# Altium PCB Glowna_plytka.PcbDoc
Units mil, origin at the board's own origin, x right, y up, seen from the top; angles counter-clockwise.
Board outline 3940 x 3940 mil, 2 copper layers (Top Layer, Bottom Layer); 69 components, 57 nets, 273 pads, 20 vias.
Unrouted connection lines stored in the file: 128.
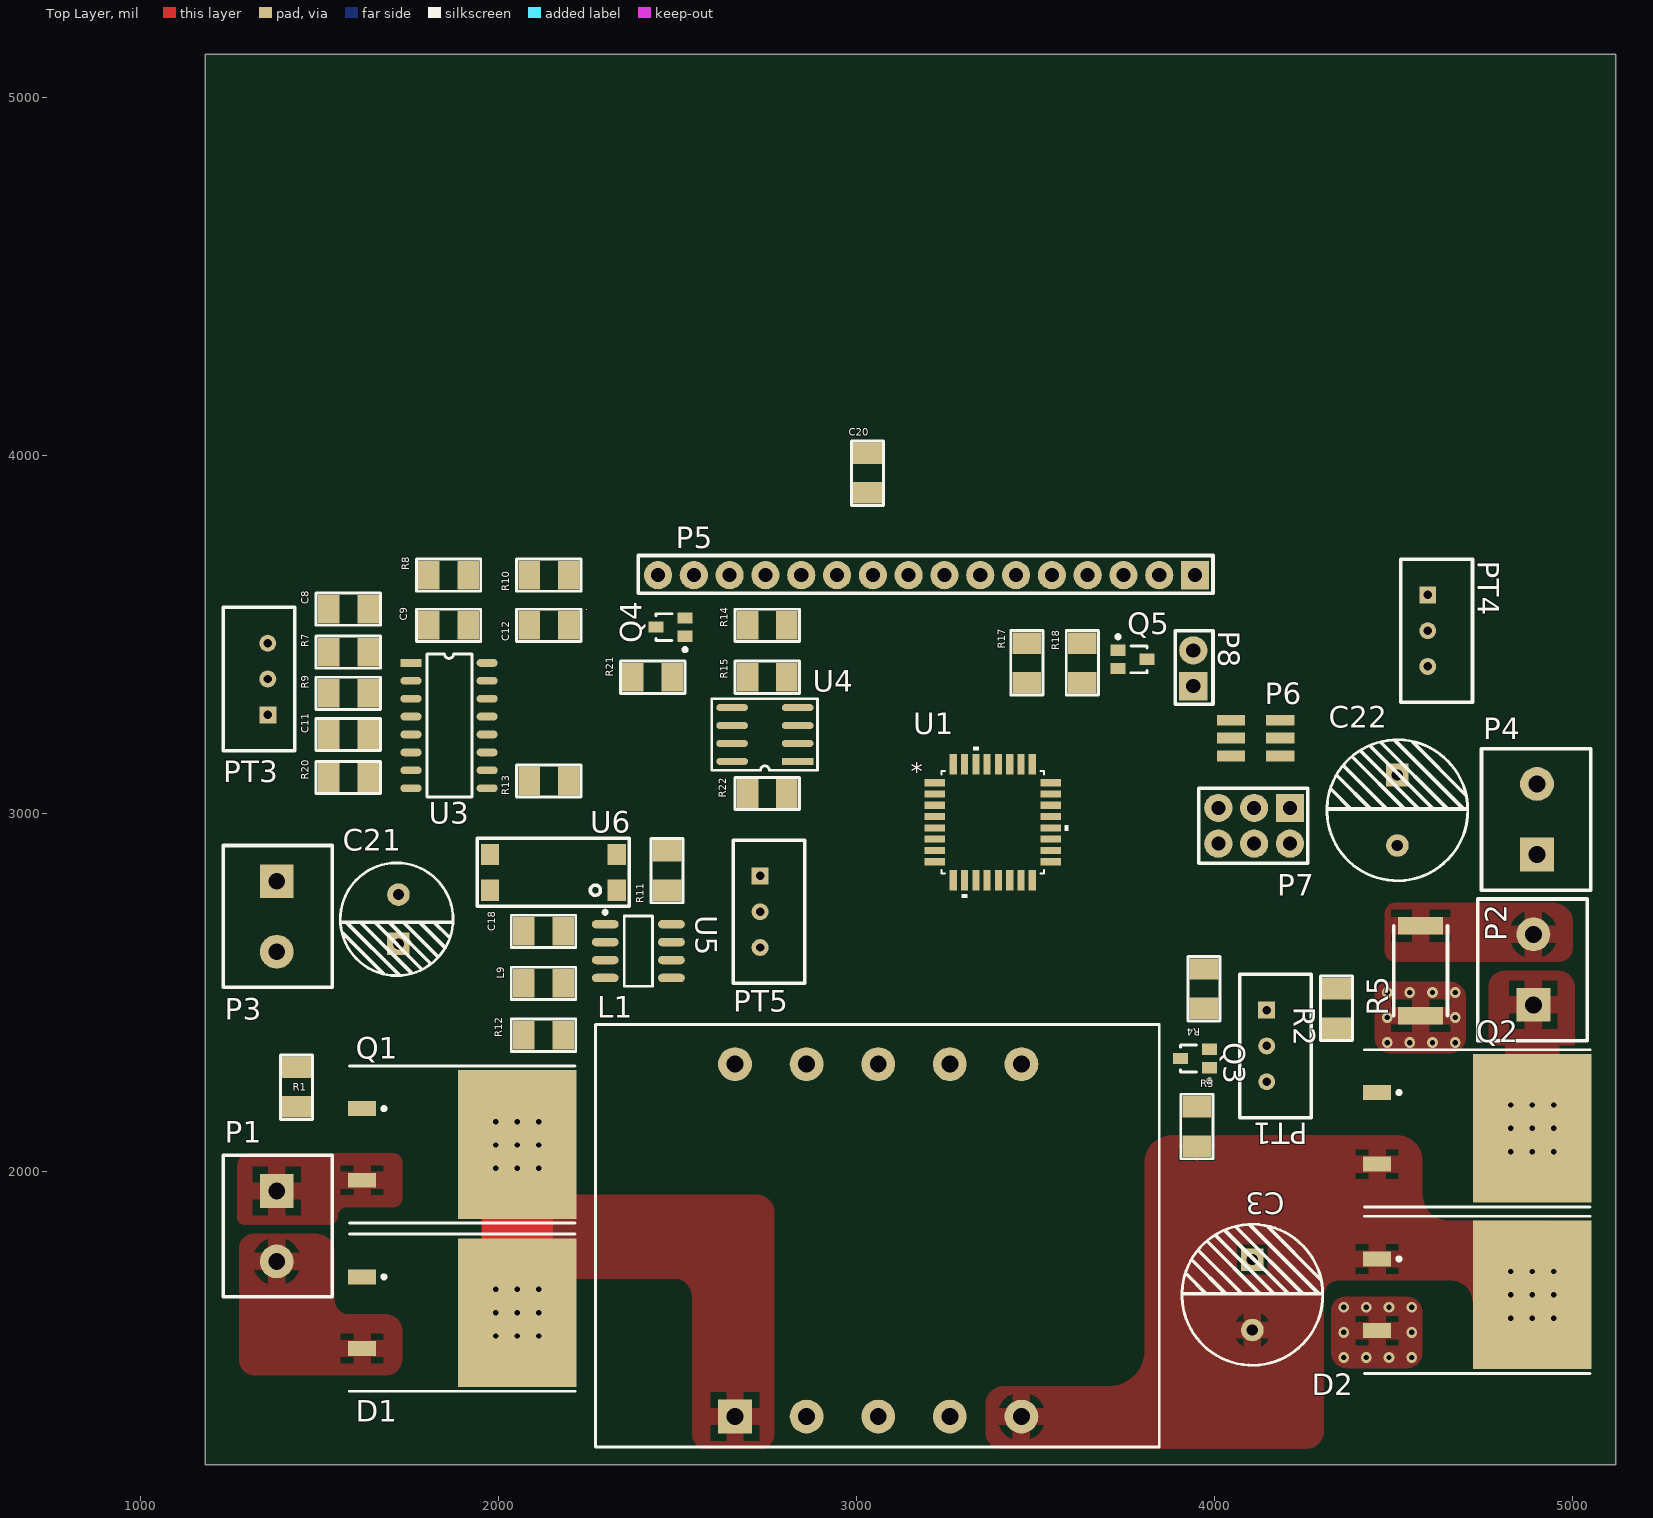
[diagram p0: Top Layer view]
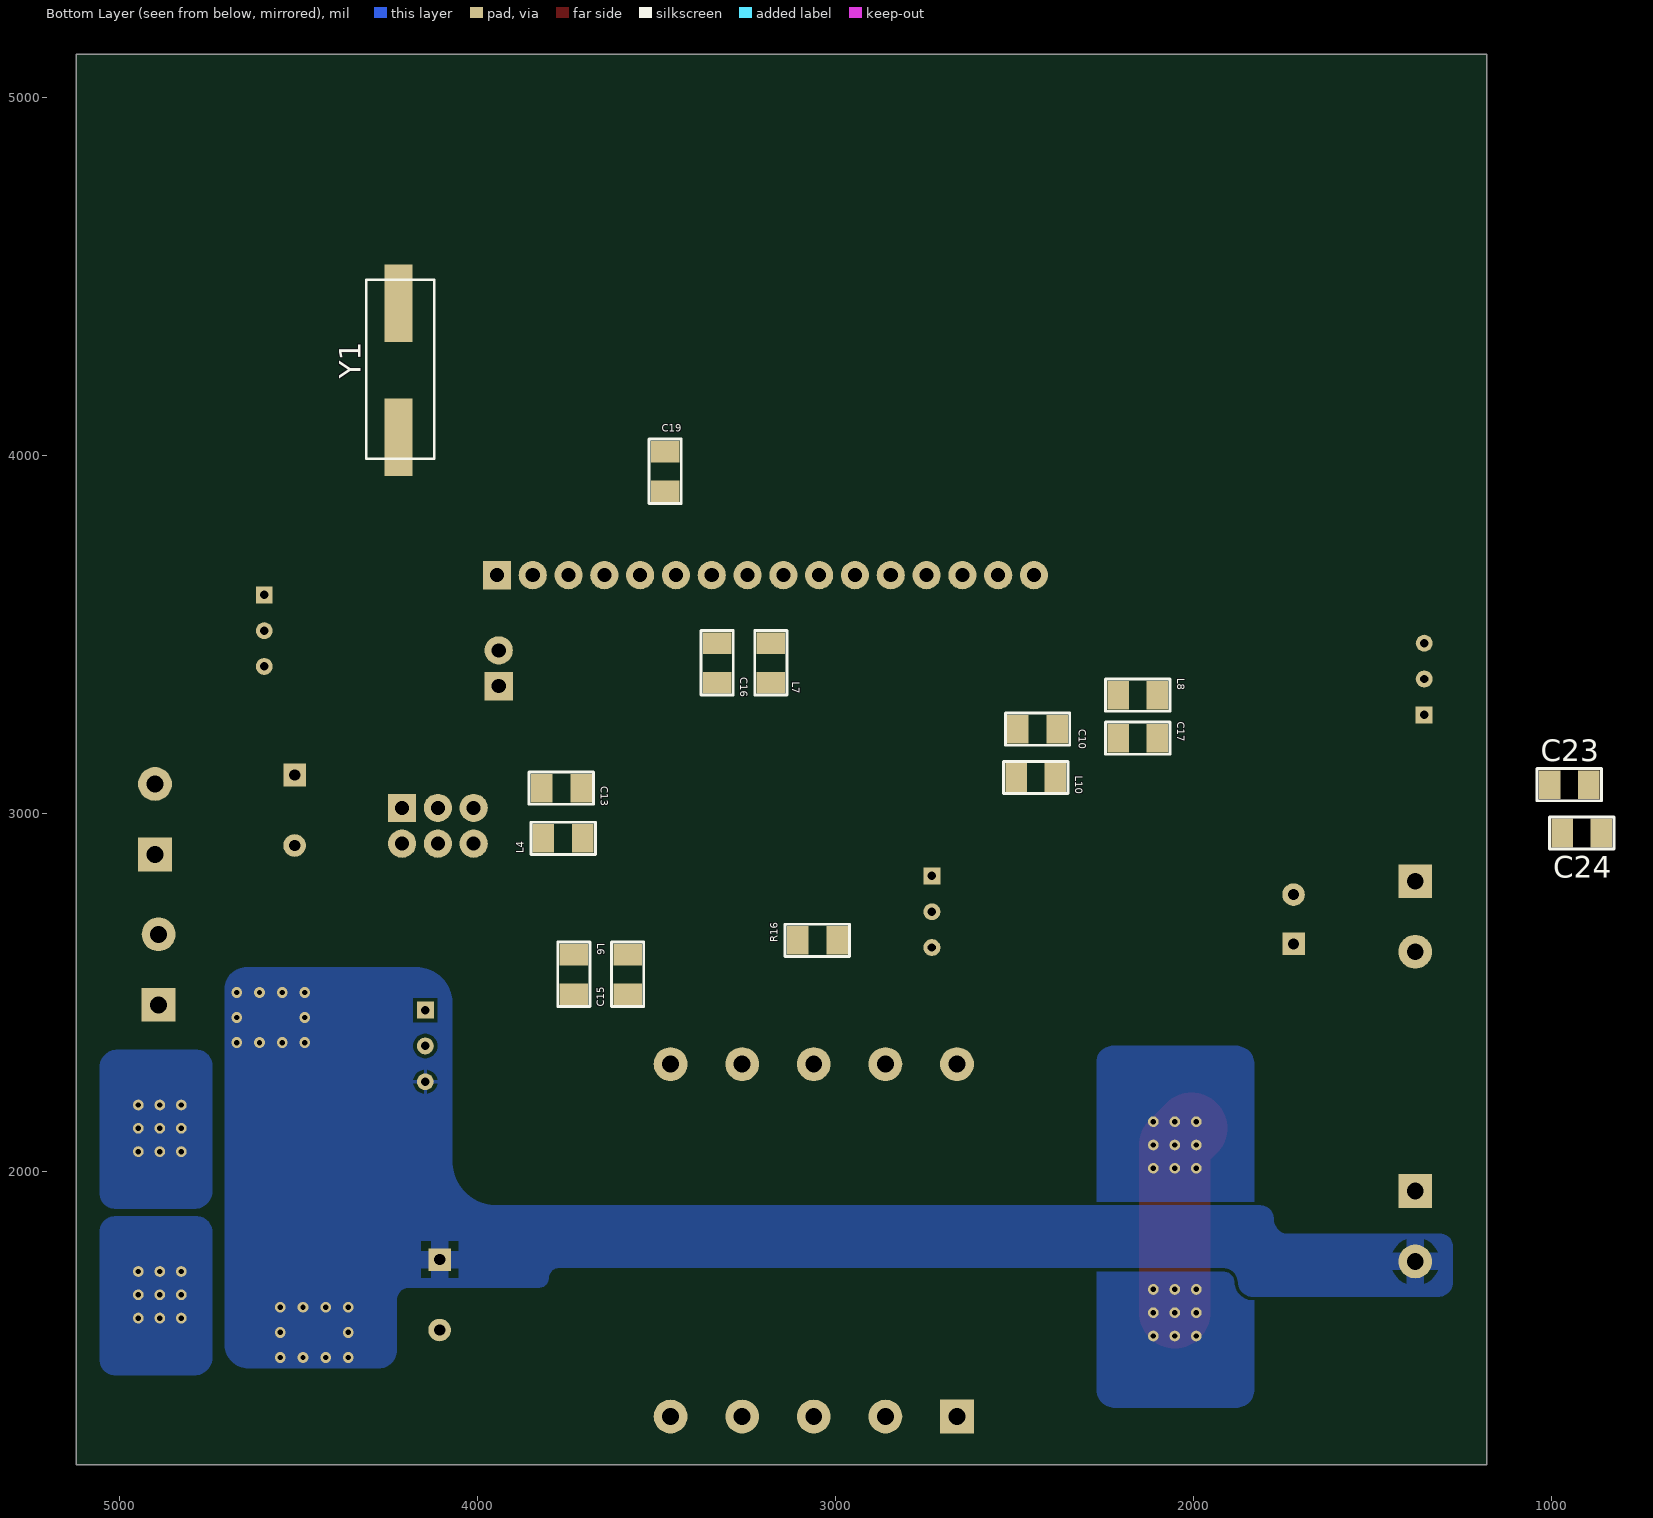
[diagram p1: Bottom Layer view, seen from below]

## Layer stack, top to bottom
Top Solder: solder mask 0.4, Solder Resist, Dk 3.5
Top Layer: signal copper 1.4
Dielectric1: dielectric 12.6, FR-4, Dk 4.8
Bottom Layer: signal copper 1.4
Bottom Solder: solder mask 0.4, Solder Resist, Dk 3.5

## Board outline
1180,1180 5120,1180 5120,5120 1180,5120

## Design rules (kind name [scope] priority, off if disabled: settings)
Clearance [All] p1: gap=10 ignorepadtopadclearanceinfootprint=FALSE except(0: Arc-Hole Track-Hole SMDPad-Hole THPad-Hole Via-Hole Fill-Hole Poly-Hole Region-Hole Text-Hole; 6: SMDPad-SMDPad)
PlaneConnect [All] p1: planeconnectstyle=Relief reliefexpansion=20 reliefentries=4 reliefconductorwidth=20 reliefairgap=10
PolygonConnect PolygonConnect_3 [InNet('VCC_MAIN')] p1: thpad.connectstyle=Relief thpad.reliefconductorwidth=50 thpad.reliefentries=4 thpad.polygonreliefangle="90 Angle" thpad.airgapwidth=20 smdpad.connectstyle=Relief smdpad.reliefconductorwidth=50 smdpad.reliefentries=4 smdpad.polygonreliefangle="90 Angle" smdpad.airgapwidth=20 via.connectstyle=Relief via.reliefconductorwidth=50 via.reliefentries=4 via.polygonreliefangle="90 Angle" via.airgapwidth=10
PolygonConnect PolygonConnect_1 [HasFootprint('D2PAK')] p2: thpad.connectstyle=Relief thpad.reliefconductorwidth=10 thpad.reliefentries=4 thpad.polygonreliefangle="90 Angle" thpad.airgapwidth=10 smdpad.connectstyle=Relief smdpad.reliefconductorwidth=150 smdpad.reliefentries=4 smdpad.polygonreliefangle="90 Angle" smdpad.airgapwidth=25 via.connectstyle=Relief via.reliefconductorwidth=10 via.reliefentries=4 via.polygonreliefangle="90 Angle" via.airgapwidth=10
PolygonConnect PolygonConnect_2 [ViaSize] p3: connectstyle=Direct reliefconductorwidth=10 reliefentries=4 polygonreliefangle="90 Angle" airgapwidth=10
PolygonConnect [All] p4: connectstyle=Relief reliefconductorwidth=10 reliefentries=4 polygonreliefangle="90 Angle" airgapwidth=10
RoutingVias [All] p1: holewidth=28 width=50 viastyle="Through Hole" minholewidth=8 minwidth=16 maxholewidth=28 maxwidth=50
SolderMaskExpansion [All] p1: expansion=4 istentingtop=FALSE
Width [All] p1: maxlimit=200 minlimit=6 preferedwidth=10 minimp=50.000000 maximp=50.000000 favimp=50.000000
29 further rules are at their usual default settings.

## Classes and differential pairs
component class OBwod_sterowania_STM32: C19 C20 P5 P6 P7 P8 PT4 Q4 Q5 R14 R15 R16 R17 R18 U1 Y1
component class Obwod_sterowania_MOSFET: C8 C9 C10 C11 C12 C13 C15 C16 C17 C18 C23 C24 L4 L6 L7 L8 L9 L10 PT3 PT5 R7 R8 R9 R10 R11 R12 R13 R20 R21 R22 U3 U4 U5 U6
component class Obwody_zasilania: C3 C21 C22 D1 D2 L1 P1 P2 P3 P4 PT1 Q1 Q2 Q3 R1 R2 R3 R4 R5

## Components (designator, comment, footprint, x,y, rotation, side; value= is the part's Value field where it differs from the comment)
C3 "Kondesator elektrolityczny" C_POL_D10x16 4105,1753.43 r270 top
C8 "Kondesator" SMD-1206C 1580,3570 r90 top
C9 "Kondesator" SMD-1206C 1860,3525 r90 top
C10 "Kondesator" SMD-1206C 2435,3235 r270 bottom
C11 "Kondesator" SMD-1206C 1580,3220 r90 top
C12 "Kondesator elektrolityczny" SMD-1206C 2140,3525 r270 top
C13 "Kondesator" SMD-1206C 3765,3070 r90 bottom
C15 "Kondesator" SMD-1206C 3580,2550 r0 bottom
C16 "Kondesator" SMD-1206C 3330,3420 r0 bottom
C17 "Kondesator" SMD-1206C 2155,3210 r90 bottom
C18 "Kondesator" SMD-1206C 2125,2670 r90 top
C19 "Kondesator" SMD-1206C 3475,3955 r0 bottom
C20 "Kondesator" SMD-1206C 3030,3950 r0 top
C21 "Kondesator elektrolityczny" C_POL_D8x11,5 1720,2635 r90 top
C22 "Kondesator elektrolityczny" C_POL_D10x16 4510,3106.85 r270 top
C23 "Kondesator" SMD-1206C 950,3080 r270 bottom
C24 "Kondesator" SMD-1206C 915,2945 r270 bottom
D1 "SK1840D2" D2PAK#1 1835,1605 r270 top
D2 "SK1840D2" D2PAK#1 4670,1655 r270 top
L1 "Inductor Iron" L-EXX/XX/X 2660,1315 r90 top
L4 "" SMD-1206-RES 3760,2930 r90 bottom
L6 "" SMD-1206-RES 3730,2550 r180 bottom
L7 "" SMD-1206-RES 3180,3420 r0 bottom
L8 "" SMD-1206-RES 2155,3330 r90 bottom
L9 "" SMD-1206-RES 2125,2525 r90 top
L10 "" SMD-1206-RES 2440,3100 r270 bottom
P1 "Złacze śrubowe" ARK2-5mm 1380,1945 r0 top
P2 "Złacze śrubowe" ARK2-5mm 4890,2465 r180 top
P3 "Złacze śrubowe" ARK2-5mm 1380,2810 r0 top
P4 "Złacze śrubowe" ARK2-5mm 4900,2885 r180 top
P5 "LCD_Con." "Header_Male 1x16" 3945,3665 r180 top
P6 "SWD_Con" "goldpin SMD 1,27" 4045,3260 r270 top
P7 "Encorder_Con" "Header_Male 2X3" 4210,3015 r180 top
P8 "Buz_Con" "Header_Male 1x2" 3940,3355 r90 top
PT1 "Potentiometer" Potecjomert 4145,2450 r270 top
PT3 "Potentiometer" Potecjomert 1355,3275 r90 top
PT4 "Potentiometer" Potecjomert 4595,3610 r270 top
PT5 "Potentiometer" Potecjomert 2730,2825 r270 top
Q1 "IRF4905" D2PAK#2 1835,2075 r270 top
Q2 "IRF4905" D2PAK#2 4670,2120 r270 top
Q3 "BC817-16" SOT323 3945,2315 r90 top
Q4 "BC817-16" SOT323 2480,3520 r90 top
Q5 "BC817-16" SOT323 3770,3430 r270 top
R1 "Rezystor" SMD-1206-RES 1435,2235 r0 top
R2 "Rezystor" SMD-1206-RES 4340,2455 r180 top
R3 "Rezystor" SMD-1206-RES 3950,2125 r0 top
R4 "Rezystor" SMD-1206-RES 3970,2510 r0 top
R5 "Rezystor" SMD-2512-RES 4575,2560 r90 top
R7 "Rezystor" SMD-1206-RES 1580,3450 r90 top
R8 "Rezystor" SMD-1206-RES 1860,3665 r270 top
R9 "Rezystor" SMD-1206-RES 1580,3335 r90 top
R10 "Rezystor" SMD-1206-RES 2140,3665 r90 top
R11 "Rezystor" SMD-1206-RES 2470,2840 r0 top
R12 "Rezystor" SMD-1206-RES 2125,2380 r270 top
R13 "Rezystor" SMD-1206-RES 2140,3090 r270 top
R14 "Rezystor" SMD-1206-RES 2750,3525 r90 top
R15 "Rezystor" SMD-1206-RES 2750,3380 r270 top
R16 "Rezystor" SMD-1206-RES 3050,2645 r90 bottom
R17 "Rezystor" SMD-1206-RES 3475,3420 r180 top
R18 "Rezystor" SMD-1206-RES 3630,3420 r0 top
R20 "Rezystor" SMD-1206-RES 1580,3100 r270 top
R21 "Rezystor" SMD-1206-RES 2430,3380 r270 top
R22 "Rezystor" SMD-1206-RES 2750,3055 r270 top
U1 "STM32F030K6T6" LQFP-32 3380,2975 r0 top
U3 "TL494" SOP16 1755,3420 r0 top
U4 "LM358D" SOIC8 2835,3145 r180 top
U5 "IXDI609SIA" SO8 2390,2615 r0 top
U6 "Transoptor" S1 2330,2885 r180 top
Y1 "16MHz" HC49SM 4220,4050 r90 bottom

## Footprints (in the part's own frame and the unit in brackets; to place one, negate y for a bottom-side part, rotate by r counter-clockwise, add the part's x,y. Pads: shape width x height; smd on the part's side, far side on the other; paste and mask are expansions set on the pad)
ARK2-5mm [mm] "ARK2-5mm"
  rect 2.4x2.4 hole 1.2: 1(0,0)
  round 2.4 hole 1.2: 2(0,-5)
  silkscreen extent -3.81,-7.51 3.94,2.54, body extent -3.94,-7.49 4.06,2.66, height 10.13
C_POL_D8x11,5 [mm]
  rect 1.6x1.6 hole 0.8: 1(0,0)
  round 1.6 hole 0.8: 2(3.5,0)
  silkscreen extent -2.25,-3.87 5.75,4.13, body extent -2.25,-4.03 5.8,4.03, height 11.93
C_POL_D10x16 [mm]
  rect 1.6x1.6 hole 0.8: 1(0,0)
  round 1.6 hole 0.8: 2(5,0)
  silkscreen extent -2.5,-5 7.5,5, body extent -2.49,-5.03 7.57,5.03, height 16.33
D2PAK#1 [mm] "D2-PAK/TO-263-AB; 3 Leads (1 Cropped); Body 15.5 (inc. leads) x 10.5 mm (LxW max)"
  rect 1.05x2 smd: 1(-2.54,-5.5) 3(2.54,-5.5)
  rect 10.55x8.4 smd: 4(0,5.5)
  silkscreen extent -5.58,-6.4 5.58,9.6, body extent -5.1,-5.43 5.1,9.58, height 4.5
D2PAK#2 [mm] "D2-PAK/TO-263-AB; 3 Leads (1 Cropped); Body 15.5 (inc. leads) x 10.5 mm (LxW max)"
  rect 1.05x2 smd: 1(-2.54,-5.5) 3(2.54,-5.5)
  rect 10.55x8.4 smd: 2(0,5.5)
  silkscreen extent -5.58,-6.4 5.58,9.6, body extent -5.1,-5.43 5.1,9.58, height 4.5
"goldpin SMD 1,27" [mm]
  rect 0.76x2 smd: 1(0,0) 2(0,3.5) 3(1.27,0) 4(1.27,3.5) 5(2.54,0) 6(2.54,3.5)
  body extent -0.64,-0.97 3.17,4.53, height 4.55
HC49SM [mm]
  rect 5.5x2 smd: 1(0,0) 2(9.5,0)
  silkscreen extent -1.52,-2.54 11.18,2.29, body extent -1.57,-2.54 11.23,2.29, height 4.3
"Header_Male 1x2" [mm]
  rect 2x2 hole 1: 1(0,0)
  round 2 hole 1: 2(2.54,0)
  silkscreen extent -1.27,-1.4 3.94,1.27, body extent -1.27,-1.27 3.81,1.27, height 9.5
"Header_Male 1x16" [mm]
  rect 2x2 hole 1: 1(0,0)
  round 2 hole 1: 2(2.54,0) 3(5.08,0) 4(7.62,0) 5(10.16,0) 6(12.7,0) 7(15.24,0) 8(17.78,0) 9(20.32,0) 10(22.86,0) 11(25.4,0) 12(27.94,0) 13(30.48,0) 14(33.02,0) 15(35.56,0) 16(38.1,0)
  silkscreen extent -1.27,-1.4 39.5,1.27, body extent -1.27,-1.27 39.37,1.27, height 9.5
"Header_Male 2X3" [mm]
  rect 2x2 hole 1: 1(0,0)
  round 2 hole 1: 2(0,2.54) 3(2.54,0) 4(2.54,2.54) 5(5.08,0) 6(5.08,2.54)
  silkscreen extent -1.27,-1.4 6.48,3.94, body extent -1.27,-1.27 6.35,3.81, height 9.5
L-EXX/XX/X [mm]
  rect 2.4x2.4 hole 1.2: 1(0,0)
  round 2.4 hole 1.2: 2(0,-5.08) 3(0,-10.16) 4(0,-15.24) 5(0,-20.32) 6(25,-20.32) 7(25,-15.24) 8(25,-10.16) 9(25,-5.08) 10(25,0)
  silkscreen extent -2.16,-30.1 27.81,9.91
LQFP-32 [mil]
  rect 58x20 smd paste+0 mask+0: 1(-162,110.24) 2(-162,78.74) 3(-162,47.24) 4(-162,15.75) 5(-162,-15.75) 6(-162,-47.24) 7(-162,-78.74) 8(-162,-110.24) 17(162,-110.24) 18(162,-78.74) 19(162,-47.24) 20(162,-15.75) 21(162,15.75) 22(162,47.24) 23(162,78.74) 24(162,110.24)
  rect 20x58 smd paste+0 mask+0: 9(-110.24,-162) 10(-78.74,-162) 11(-47.24,-162) 12(-15.75,-162) 13(15.75,-162) 14(47.24,-162) 15(78.74,-162) 16(110.24,-162) 25(110.24,162) 26(78.74,162) 27(47.24,162) 28(15.75,162) 29(-15.75,162) 30(-47.24,162) 31(-78.74,162) 32(-110.24,162)
  silkscreen extent -143,-211 211,211, body extent -177,-177 177,177, height 63
Potecjomert [mm]
  rect 1.2x1.2 hole 0.6: 1(0,0)
  round 1.2 hole 0.6: 2(2.54,0) 3(5.08,0)
  silkscreen extent -2.54,-1.91 7.62,3.18, body extent -2.54,-1.91 7.62,3.18, height 12.57
S1 [mm]
  rect 1.3x1.5 smd: 1(0,2.54) 2(0,0) 3(9,0) 4(9,2.54)
  silkscreen extent -0.89,-1.14 9.91,3.68, body extent -0.64,-1.03 9.53,3.57, height 3.51
SMD-1206-RES [mil]
  rect 80x60 smd: 1(0,55) 2(0,-55)
  silkscreen extent -45,-90 45,90, body extent -34,-66 34,66, height 33
SMD-1206C [mil]
  rect 80x60 smd: 1(0,55) 2(0,-55)
  silkscreen extent -45,-90 45,90, body extent -31,-63 32,63, height 39
SMD-2512-RES [mil]
  rect 49x125 smd: 1(-125.5,0) 2(125.5,0)
  silkscreen extent -125,-75 125,75, body extent -125,-59 125,59, height 63
SO8 [mm] "8-Pin Small Outline Integrated Circuit 1.27 mm Pitch, IPC High Density"
  oval 1.9x0.6 smd: 1(-2.35,1.905) 2(-2.35,0.635) 3(-2.35,-0.635) 4(-2.35,-1.905) 5(2.35,-1.905) 6(2.35,-0.635) 7(2.35,0.635) 8(2.35,1.905)
  silkscreen extent -2.47,-2.5 1,2.88, body extent -2.89,-2.41 2.89,2.49, height 1.45
SOIC8 [mm]
  rect 2.25x0.5 smd: 1(0,0)
  oval 2.25x0.5 smd: 2(0,-1.27) 3(0,-2.54) 4(0,-3.81) 5(4.65,-3.81) 6(4.65,-2.54) 7(4.65,-1.27) 8(4.65,0)
  silkscreen extent -1.4,-4.44 6.1,0.64, body extent -0.59,-4.36 5.41,0.54
SOP16 [mm]
  rect 1.5x0.55 smd: 1(0,0)
  oval 1.5x0.55 smd: 2(0,-1.27) 3(0,-2.54) 4(0,-3.81) 5(0,-5.08) 6(0,-6.35) 7(0,-7.62) 8(0,-8.89) 9(5.4,-8.89) 10(5.4,-7.62) 11(5.4,-6.35) 12(5.4,-5.08) 13(5.4,-3.81) 14(5.4,-2.54) 15(5.4,-1.27) 16(5.4,0)
  silkscreen extent 1.14,-9.53 4.32,0.64, body extent -0.35,-9.4 5.68,0.5, height 1.75
SOT323 [mm]
  rect 0.8x1.05 smd: 1(-0.65,-1.025) 2(0.65,-1.025) 3(0,1.025)
  silkscreen extent -1.72,-1.15 0.95,1.03, body extent -1.1,-1.25 1.1,1, height 1.1

## Part data
D1 D2: "Dioda Schottky", Dostawca=TME, Kod TME=SK1840D2-DIO, Montaż=SMD, Nazwa="Dioda Schottky", Obudowa=D2PAK, Oznaczenie=SK1840D2, Parametr_1="Prąd: 18A", Parametr_2="Max prąd imp.: 280A", Parametr_3="Max nap. wsteczne: 40V", Producent="DIOTEC SEMICONDUCTOR"
L1: "Magnetic-Core Inductor", Parametr_1=113uH, Parametr_2="Ilość zwoji:", Parametr_3="Średnica drutu:", Revision="July-2002: Re-released for DXP Platform."
L4 L6 L7 L8 L9 L10: library part Filtr, Kod TME=LCBC-601, Montaż=SMD, Nazwa=Filtr, Obudowa=1206, Oznaczenie=LCBC-601
P5: library part "Header 16", "Header, 16-Pin", LatestRevisionDate=17-Jul-2002, LatestRevisionNote="Re-released for DXP Platform.", Publisher="Altium Limited"
P6 P7: library part "Header 2x3", Nazwa="Header 2x3"
P8: library part "Header 2", LatestRevisionDate=17-Jul-2002, LatestRevisionNote="Re-released for DXP Platform.", Publisher="Altium Limited"
PT1 PT3 PT4 PT5: "Potentiometer montażowy wielobortowy", Nazwa="Potentiometer montażowy wielobortowy", Parametr_2=Moc:, Parametr_3=Tolerancja:, Parametr_4=Charakterystyka:, Parametr_5="Temperatura pracy:", Parametr_6="Max nap. pracy:"
  PT1: Parametr_1=10k
  PT3: Parametr_1=100k
  PT4 PT5: Parametr_1=2k
Q1 Q2: "Traznystor MOSFET-P", Nazwa="Tranzystor MOSFET-P", Oznaczenie=IRF4905, Parametr_1="Prąd drenu: -74A", Parametr_2="Nap. dren-żródło: -55V", Parametr_3="Nap. bramka-żródło: -/+20V", Parametr_4="Rezystacja w stanie przewodzenia: 20mOhm", Parametr_6="Moc rozpraszana: 200W"
Q3 Q4 Q5: "Tranzystor bipolarny PNP", Dostawca=TME, Kod TME=BC817-16-DIO, Montaż=SMD, Nazwa="Tranzystor bipolarny PNP", Obudowa=SOT323, Oznaczenie=BC817-16, Parametr_2="Prąd kolektora: 0,8A", Parametr_3="Npa. C-E: 45V", Parametr_4="Wzmocnienie: 100-250", Parametr_5="Częstotliwość: 100Mhz", Producent="DIOTEC SEMICONDUCTOR"
U1: "No Description Available", Mfr_Name=STMicroelectronics, Copyright="Copyright (C) 2022 Ultra Librarian. All rights reserved.", Manufacturer_Part_Number=STM32F030K6T6, RefDes=RefDes, Type=DEV
U3: "DC/DC switcher, kontroler PWM", Nazwa="DC/DC switcher, kontroler PWM", Oznaczenie=TL494, Parametr_1="Prąd wyjściowy: 0,25A", Parametr_2="Częstotliwość: 300kHz", Parametr_3="Liczba kanałów: 2", Parametr_4="Temperatura pracy: 0-70C", Parametr_5="Napięcie pracy: 7-40V"
U4: "Wzmacniacz operacyjny", Nazwa="Wzmacniacz operacyjny", Oznaczenie=LM358D, Parametr_1="Pasmo przenoszenia: 1,1MHz", Parametr_2="Liczba kanałów: 2", Parametr_3="Szybkość narastania nap.:  0,6V/us", Parametr_4="Teperatura pracy: 0-70C", Parametr_5="Npa. zasilania: 3-30V"
U5: "driver MOSFET", Dostawca=TME, Kod_TME=IXDI609SIA, Montaż=SMD, Nazwa="driver MOSFET", Obudowa=SO8, Oznaczenie=IXDI609SIA, Parametr_1="Prad: -9-9A", Parametr_2="Nap. zasilania: 4,5-35V", Parametr_3="1 kanał odwracajcy", Producent=IXYS
U6: library part EL817S1(C)(TU)-F, "Kondesator elektrolityczny", Kod TME=EL817S1-C-TU-F, Nazwa=Tranzoptor, Oznaczenie=EL817S1(C)(TU)-F
Y1: library part Oscylator
C3: Dostawca=TME, Kod TME=ECA1EHG101, Montaż=THT, Nazwa="Kondesator elektrolityczny", Obudowa=D10x16, Parametr_1=220uF, Parametr_2=50V, Parametr_3=Tolerancja:, Parametr_4="Czas życzia:", Parametr_5="Temperatura pracy:"
C8 C9: Dostawca=TME, Kod TME=CL31A106KAHNNNE, Montaż=SMD, Nazwa=Kondesator, Obudowa=1206, Parametr_1=10uF, Parametr_2=Napięcie:, Parametr_3=Tolerancja:, Parametr_4="Temperatura pracy:"
C10 C13 C15 C16 C17 C18: Dostawca=TME, Kod TME=1206B104K500CT, Montaż=SMD, Nazwa=Kondesator, Obudowa=1206, Parametr_1=100nF, Parametr_2=Napięcie:, Parametr_3=Tolerancja:, Parametr_4="Temperatura pracy:"
C11: Dostawca=TME, Kod TME=CL31B102KBCNNNC, Montaż=SMD, Nazwa=Kondesator, Obudowa=1206, Parametr_1=1nF, Parametr_2=Napięcie:, Parametr_3=Tolerancja:, Parametr_4="Temperatura pracy:"
C12: Dostawca=TME, Nazwa="Kondesator elektrolityczny", Parametr_1=10uF, Parametr_2=6,3V, Parametr_3=Tolerancja:, Parametr_4="Czas życzia:", Parametr_5="Temperatura pracy:"
C19 C20: Dostawca=TME, Kod TME=1206B104K500CT, Montaż=SMD, Nazwa=Kondesator, Obudowa=1206, Parametr_1=10pF, Parametr_2=Napięcie:, Parametr_3=Tolerancja:, Parametr_4="Temperatura pracy:"
C21 C22: Dostawca=TME, Kod TME=JRG-220U/25, Montaż=THT, Nazwa="Kondesator elektrolityczny", Obudowa=D10x16, Parametr_1=220uF, Parametr_2=50V, Parametr_3=Tolerancja:, Parametr_4="Czas życzia:", Parametr_5="Temperatura pracy:"
C23 C24: Dostawca=TME, Kod TME=CL31B102KBCNNNC, Montaż=SMD, Nazwa=Kondesator, Obudowa=1206, Parametr_1=100nF, Parametr_2=Napięcie:, Parametr_3=Tolerancja:, Parametr_4="Temperatura pracy:"
P1: Dostawca=TME, Kod TME=DG300-5.0-2P12, Montaż=THT, Nazwa="Listwa zaciskowa do druku, XY301V-2P", Oznaczenie=Zasilanie, Parametr_1=250VDC/AC, Parametr_2=24A, Parametr_3=2,5mm2, Producent="DEGSON ELECTRONICS"
P2: Dostawca=TME, Kod TME=DG300-5.0-2P12, Montaż=THT, Nazwa="Listwa zaciskowa do druku, XY301V-2P", Oznaczenie=AKU, Parametr_1=250VDC/AC, Parametr_2=24A, Parametr_3=2,5mm2, Producent="DEGSON ELECTRONICS"
P3: Dostawca=TME, Kod TME=DG300-5.0-2P12, Montaż=THT, Nazwa="Listwa zaciskowa do druku, XY301V-2P", Oznaczenie=VCC_Driv, Parametr_1=250VDC/AC, Parametr_2=24A, Parametr_3=2,5mm2, Producent="DEGSON ELECTRONICS"
P4: Dostawca=TME, Kod TME=DG300-5.0-2P12, Montaż=THT, Nazwa="Listwa zaciskowa do druku, XY301V-2P", Oznaczenie=VCC_3,3V, Parametr_1=250VDC/AC, Parametr_2=24A, Parametr_3=2,5mm2, Producent="DEGSON ELECTRONICS"
R1: Dostawca=TME, Kod TME=AC1206FR-0710RL, Montaż=SMD, Nazwa=Rezystor, Obudowa=1206, Parametr_1=10R, Parametr_2="Moc: 0,250W", Parametr_3="Tolerancja: 5%", Parametr_4="Max nap. pracy:", Parametr_5="Max nap impulsowe:"
R2: Dostawca=TME, Kod TME=SMD1206-100K, Montaż=SMD, Nazwa=Rezystor, Obudowa=1206, Parametr_1=10k, Parametr_2="Moc: 0,250W", Parametr_3="Tolerancja: 5%", Parametr_4="Max nap. pracy:", Parametr_5="Max nap impulsowe:"
R3 R4 R14 R18: Dostawca=TME, Kod TME=SMD1206-100K, Montaż=SMD, Nazwa=Rezystor, Obudowa=1206, Parametr_1=100k, Parametr_2="Moc: 0,250W", Parametr_3="Tolerancja: 5%", Parametr_4="Max nap. pracy:", Parametr_5="Max nap impulsowe:"
R5: Dostawca=TME, Kod TME=WW12RR005FTL, Montaż=SMD, Nazwa=Rezystor, Obudowa=2512, Parametr_1=5mR, Parametr_2="Moc: 1W", Parametr_3="Tolerancja: 1%", Parametr_4="Max nap. pracy:", Parametr_5="Max nap impulsowe:"
R7 R8: Kod TME=CRCW12061K00JNTABC, Nazwa=Rezystor, Parametr_1=1k, Parametr_2=Moc:, Parametr_3=Tolerancja:, Parametr_4="Max nap. pracy:", Parametr_5="Max nap impulsowe:"
R9 R21: Kod TME=SMD1206-51K, Nazwa=Rezystor, Parametr_1=51k, Parametr_2=Moc:, Parametr_3=Tolerancja:, Parametr_4="Max nap. pracy:", Parametr_5="Max nap impulsowe:"
R10 R13 R20: Kod TME=SMD1206-51K, Nazwa=Rezystor, Parametr_1=10k, Parametr_2=Moc:, Parametr_3=Tolerancja:, Parametr_4="Max nap. pracy:", Parametr_5="Max nap impulsowe:"
R11 R12 R22: Kod TME=SMD1206-51K, Nazwa=Rezystor, Parametr_1=1k, Parametr_2=Moc:, Parametr_3=Tolerancja:, Parametr_4="Max nap. pracy:", Parametr_5="Max nap impulsowe:"
R15 R16 R17: Dostawca=TME, Kod TME=SMD1206-100K, Montaż=SMD, Nazwa=Rezystor, Obudowa=1206, Parametr_1=1k, Parametr_2="Moc: 0,250W", Parametr_3="Tolerancja: 5%", Parametr_4="Max nap. pracy:", Parametr_5="Max nap impulsowe:"

## Free pads (board coordinates)
  round 30 hole 15: 2(1991.54,1540) 2(1991.54,1605) 2(1991.54,1670) 2(1991.54,2008.46) 2(1991.54,2073.46) 2(1991.54,2138.46) 2(2051.54,1540) 2(2051.54,1605) 2(2051.54,1670) 2(2051.54,2008.46) 2(2051.54,2073.46) 2(2051.54,2138.46) 2(2111.54,1540) 2(2111.54,1605) 2(2111.54,1670) 2(2111.54,2073.46) 2(2111.54,2138.46) 2(4826.54,1590) 2(4826.54,1655) 2(4826.54,1720) 2(4826.54,2055) 2(4826.54,2120) 2(4826.54,2185) 2(4886.54,1590) 2(4886.54,1655) 2(4886.54,1720) 2(4886.54,2055) 2(4886.54,2120) 2(4886.54,2185) 2(4946.54,1590) 2(4946.54,1655) 2(4946.54,1720) 2(4946.54,2055) 2(4946.54,2120) 2(4946.54,2185)
  round 30 hole 15 mask+0: 2(2111.54,2008.46)

## Via types
v1: diameter 30, hole 15, Top Layer to Bottom Layer, 20 vias

## Nets (pads, with @x,y where several pads share a name; then routed paths per layer and width w, separated by ;. In a path a pad name is that pad's centre, name@x,y a point inside that pad or via, vN(x,y) a via of type N, cw(c..) or ccw(c..) an arc to the next point about the centre after c; other vN are vias at no path point)
GND: C3.1 C8.1 C9.1 C10.1 C11.1 C13.1 C15.1 C16.1 C17.1 C18.1 C19.2 C20.1 C21.1 C22.1 C23.1 C24.1 D1.3 D2.3 P1.2 P3.2 P4.2 P5.1 P5.16 P6.4 P6.6 P7.4 P7.6 PT1.3 PT3.3 PT4.1 PT5.3 Q3.2 Q4.2 Q5.2 R5.1 R10.2 R11.1 R13.1 R14.2 R18.2 U1.16 U1.32 U3.7 U4.4 U5.4 U5.5 U6.3
  other v1: 4360,1480 4423.33,1480 4486.67,1480 4550,1480 4360,1550 4550,1550 4360,1620 4423.33,1620 4486.67,1620 4550,1620 4481.54,2359.5 4544.87,2359.5 4608.2,2359.5 4671.54,2359.5 4481.54,2429.5 4671.54,2429.5 4481.54,2499.5 4544.87,2499.5 4608.2,2499.5 4671.54,2499.5
NetC3_2: C3.2 D2.1 D2.4 L1.5 pad.2@4826.54,1590 pad.2@4826.54,1655 pad.2@4826.54,1720 pad.2@4886.54,1590 pad.2@4886.54,1655 pad.2@4886.54,1720 pad.2@4946.54,1590 pad.2@4946.54,1655 pad.2@4946.54,1720 Q2.3 R3.2
NetC8_2: C8.2 R7.2 R9.2 U3.2
NetC9_2: C9.2 R8.2 U3.15
NetC11_2: C11.2 U3.5
NetC12_1: C12.1 R10.1 U3.4
NetC12_2: C12.2 U3.13 U3.14
NetC19_1: C19.1 U1.3 Y1.1
NetC20_2: C20.2 U1.2 Y1.2
NetC23_2: C23.2 P2.2 R5.2 U4.5
NetC24_2: C24.2 PT1.1 PT1.2 R2.2 U4.3
NetD1_1: D1.1 D1.4 L1.1 pad.2@1991.54,1540 pad.2@1991.54,1605 pad.2@1991.54,1670 pad.2@1991.54,2008.46 pad.2@1991.54,2073.46 pad.2@1991.54,2138.46 pad.2@2051.54,1540 pad.2@2051.54,1605 pad.2@2051.54,1670 pad.2@2051.54,2008.46 pad.2@2051.54,2073.46 pad.2@2051.54,2138.46 pad.2@2111.54,1540 pad.2@2111.54,1605 pad.2@2111.54,1670 pad.2@2111.54,2008.46 pad.2@2111.54,2073.46 pad.2@2111.54,2138.46 Q1.2 | length 534.3
  Top Layer w200: Q1.2@2005,2120 2051.54,2073.46 2051.54,2008.46 2051.54,1670 D1.4
NetP2_1: P2.1 pad.2@4826.54,2055 pad.2@4826.54,2120 pad.2@4826.54,2185 pad.2@4886.54,2055 pad.2@4886.54,2120 pad.2@4886.54,2185 pad.2@4946.54,2055 pad.2@4946.54,2120 pad.2@4946.54,2185 Q2.2 R2.1
NetP5_3: P5.3 PT4.2
NetP5_4: P5.4
NetP5_5: P5.5
NetP5_6: P5.6
NetP5_11: P5.11
NetP5_12: P5.12
NetP5_13: P5.13
NetP5_14: P5.14
NetP5_15: P5.15 Q4.3
NetP6_5: P6.5 R16.2 U1.4
NetP7_1: P7.1
NetP7_3: P7.3
NetP7_5: P7.5
NetP8_1: P8.1 Q5.3
NetPT3_1: PT3.1 PT3.2 R20.2
NetPT5_1: PT5.1 PT5.2 R22.2
NetQ1_1: Q1.1 R1.2
NetQ2_1: Q2.1 Q3.3 R3.1
NetQ3_1: Q3.1 R4.2
NetQ4_1: Q4.1 R14.1 R15.2
NetQ5_1: Q5.1 R17.2 R18.1
NetR1_1: R1.1 U5.6 U5.7
NetR4_1: R4.1
NetR7_1: R7.1
NetR8_1: R8.1
NetR9_1: R9.1 U3.3
NetR11_2: R11.2 U6.2
NetR12_1: R12.1 U5.2 U6.4
NetR13_2: R13.2 U3.9 U3.10 U6.1
NetR15_1: R15.1
NetR17_1: R17.1
NetR20_1: R20.1 U3.6
NetR21_1: R21.1 R22.1 U4.6
NetR21_2: R21.2 U1.7 U3.16 U4.7
NetU1_6: U1.6 U3.1 U4.1 U4.2
VCC_3,3V: C22.2 L4.1 L6.1 L7.1 L10.1 P4.1 P5.2 P6.2 P7.2 P8.2 PT4.3 R16.1
VCC_Driv: C21.2 L9.1 P3.1 R12.2
VCC_MAIN: L8.1 P1.1 Q1.3 U3.8 U3.11
VCCF1_3,3V: C15.2 L6.2 U1.1
VCCF2_3,3V: C13.2 L4.2 U1.17
VCCF3_3,3V: C16.2 L7.2 U1.5
VCCF_3,3V: C10.2 L10.2 U4.8
VCCF_Driv: C18.2 L9.2 U5.1 U5.8
VCCF_Main: C17.2 L8.2 U3.12
pads on no net: L1.2 L1.3 L1.4 L1.6 L1.7 L1.8 L1.9 L1.10 P5.7 P5.8 P5.9 P5.10 P6.1 P6.3 U1.8 U1.9 U1.10 U1.11 U1.12 U1.13 U1.14 U1.15 U1.18 U1.19 U1.20 U1.21 U1.22 U1.23 U1.24 U1.25 U1.26 U1.27 U1.28 U1.29 U1.30 U1.31 U5.3

## Polygon pours and split planes (outlines as drawn)
NetC23_2 on Top Layer "NETC23_2_L01_P014" (solid, pour order 14): 5000,2695 5000,2625 cw(c4960,2625) 4960,2585 4505,2585 cw(c4505,2615) 4475,2615 4475,2720 cw(c4505,2720) 4505,2750 4945,2750 cw(c4945,2695)
GND on Top Layer "GND_L01_P015" (solid, pour order 15): 4446.54,2489.5 4446.54,2374.5 ccw(c4491.54,2374.5) 4491.54,2329.5 4656.54,2329.5 ccw(c4656.54,2374.5) 4701.54,2374.5 4701.54,2484.5 ccw(c4656.54,2484.5) 4656.54,2529.5 4486.54,2529.5 ccw(c4486.53,2489.5)
NetP2_1 on Top Layer "NETP2_1_L01_P013" (solid, pour order 13): 4765,2230 5005,2230 5005,2515 ccw(c4960,2515) 4960,2560 4810,2560 ccw(c4810,2515) 4765,2515
NetC3_2 on Top Layer (solid, pour order 12): 4720,1635 4935,1635 4935,1862.52 4652.48,1862.52 cw(c4652.48,1935) 4580,1935 4580,2030 ccw(c4510.01,2030) 4510,2100 3879.98,2100 ccw(c3879.98,2024.84) 3804.82,2024.84 3804.82,2024.81 3805,1635 3805,1500 cw(c3705.01,1499.99) 3705,1400 3410,1400 ccw(c3409.99,1350.01) 3360,1350 3360,1270 ccw(c3405,1270) 3405,1225 4255,1225 ccw(c4255.01,1274.99) 4305,1275 4305,1655 cw(c4345,1655) 4345,1695 4660,1695 cw(c4660,1635)
GND on Top Layer "GND_L01_P011" (solid, pour order 11): 1540,1775 1540,1645 ccw(c1585,1645) 1585,1600 1685,1600 cw(c1685,1555) 1730,1555 1730,1475 cw(c1685,1475) 1685,1430 1320,1430 cw(c1320,1475) 1275,1475 1275,1785 cw(c1315,1785) 1315,1825 1490,1825 cw(c1490,1775)
GND on Top Layer "GND_L01_P008" (solid, pour order 8): 4325,1610 4325,1495 ccw(c4370,1495) 4370,1450 4535,1450 ccw(c4535,1495) 4580,1495 4580,1605 ccw(c4535,1605) 4535,1650 4365,1650 ccw(c4365,1610)
NetD1_1 on Top Layer " " (solid, pour order 6): 2490,1700 cw(c2490,1650) 2540,1650 2540,1270 ccw(c2590,1270) 2568.21,1225 2741.79,1225 ccw(c2720,1270) 2770,1270 2770,1885 ccw(c2720,1885) 2720,1935 2110,1935 2110,1700
VCC_MAIN on Top Layer "VCC_MAIN_L01_P005" (solid, pour order 5): 1270,1870 1270,2015.86 cw(c1304.14,2015.86) 1304.14,2050 1705,2050 cw(c1705,2025) 1730,2025 1730,1925 cw(c1705,1925) 1705,1900 1575,1900 ccw(c1575,1875) 1550,1875 cw(c1525,1875) 1525,1850 1290,1850 cw(c1290,1870)
NetC3_2 on Bottom Layer "NETC3_2_L02_P000" (solid, pour order 0): 5055,1830 5055,1475 cw(c5010,1475) 5010,1430 4790,1430 cw(c4790,1480) 4740,1480 4740,1830 cw(c4785,1830) 4785,1875 5010,1875 cw(c5010,1830)
NetP2_1 on Bottom Layer "NETP2_1_L02_P004" (solid, pour order 4): 5055,2290 5055,1940 cw(c5010,1940) 5010,1895 4790,1895 cw(c4790,1945) 4740,1945 4740,2295 cw(c4785,2295) 4785,2340 5005,2340 cw(c5005,2290)
GND on Bottom Layer " " (solid, pour order 16): 4070,2027.5 4070,2470 cw(c4170,2470) 4170,2570 4645,2570 cw(c4645,2510) 4705,2510 4705,1515 cw(c4640,1515) 4640,1450 4275,1450 cw(c4275,1500) 4225,1500 4225,1640 ccw(c4190.02,1640.02) 4190,1675 3827.5,1675 cw(c3827.49,1702.49) 3800,1702.5 ccw(c3772.52,1702.52) 3772.5,1730 1915,1730 ccw(c1915,1690) 1875,1690 cw(c1835,1690) 1835,1650 1315,1650 cw(c1315,1690) 1275,1690 1275,1790 cw(c1310,1790) 1310,1825 1735,1825 ccw(c1735,1865) 1775,1865 cw(c1815,1865) 1815,1905 1820,1905 3947.5,1905 ccw(c3947.5,2027.5)
NetD1_1 on Bottom Layer "NETD1_1_L02_P017" (solid, pour order 17): 1830,1390 1830,2300 cw(c1880,2300) 1880,2350 2225,2350 cw(c2225,2305) 2270,2305 2270,1390 cw(c2220,1390) 2220,1340 1880,1340 cw(c1880,1390)

## Silkscreen, mask and mechanical layers (free items; w line width, h text height)
Top Overlay:
  text "." at 2250,3570 h20 r180

## Text inside footprints (layer, text, board x,y; h text height)
U1: Top Overlay "*" at 3151.5,3090.98 h50; Mechanical 13 "*" at 3244.5,3075.98 h50